# Altium PCB mkl.PcbDoc
Units mil, origin at the board's own origin, x right, y up, seen from the top; angles counter-clockwise.
Board outline 3515 x 1880 mil, 2 copper layers (Top Layer, Bottom Layer); 28 components, 69 nets, 203 pads, 0 vias.
Unrouted connection lines stored in the file: 7.
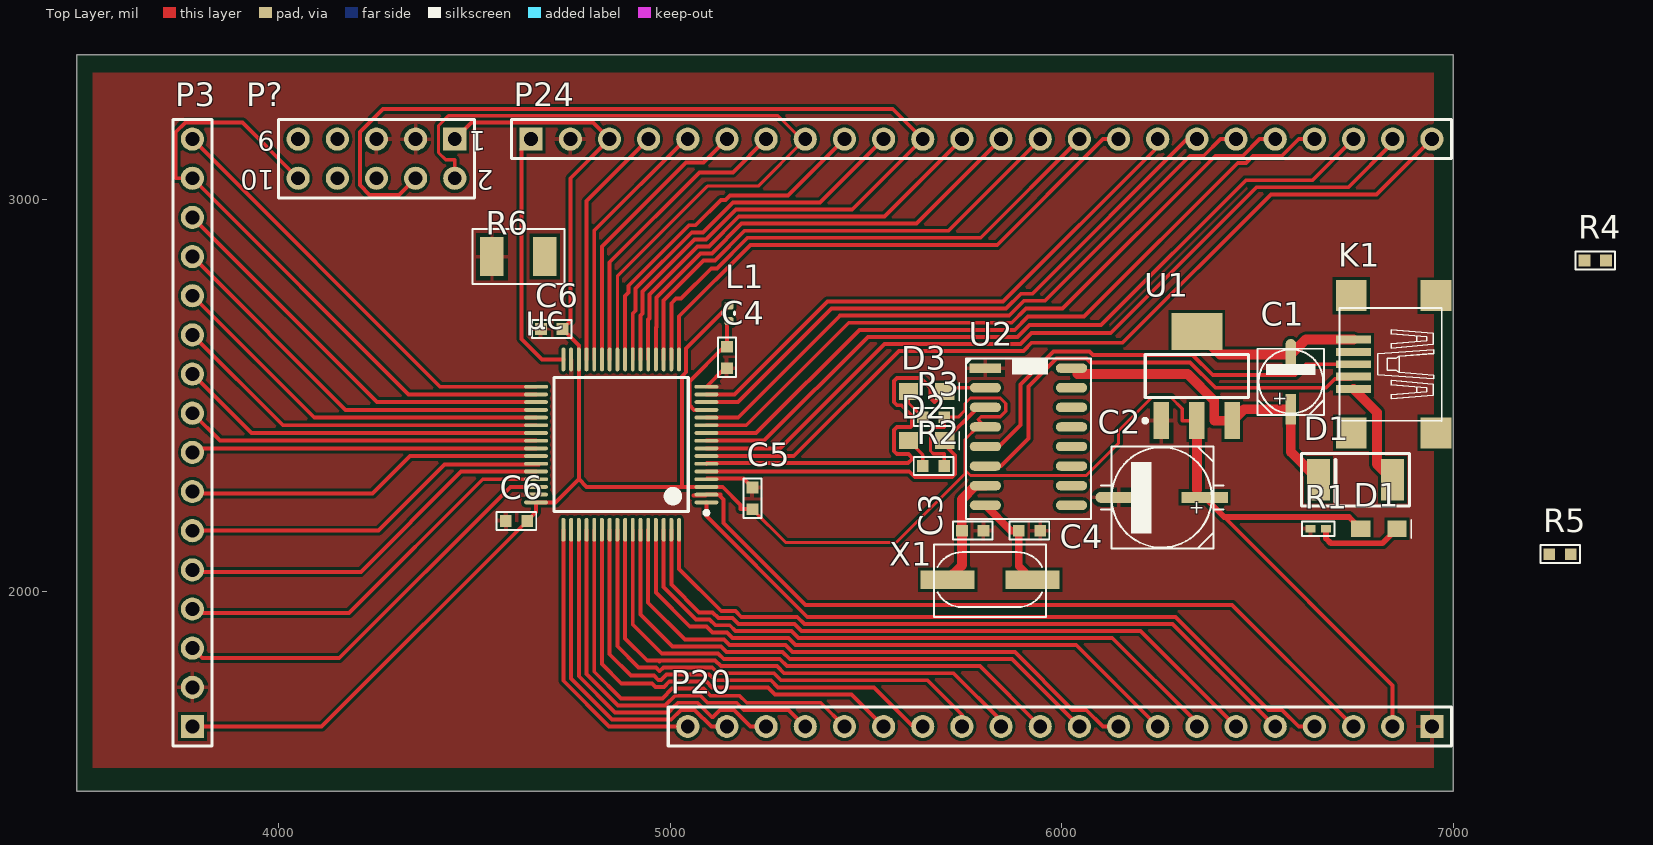
[diagram p0: Top Layer view]
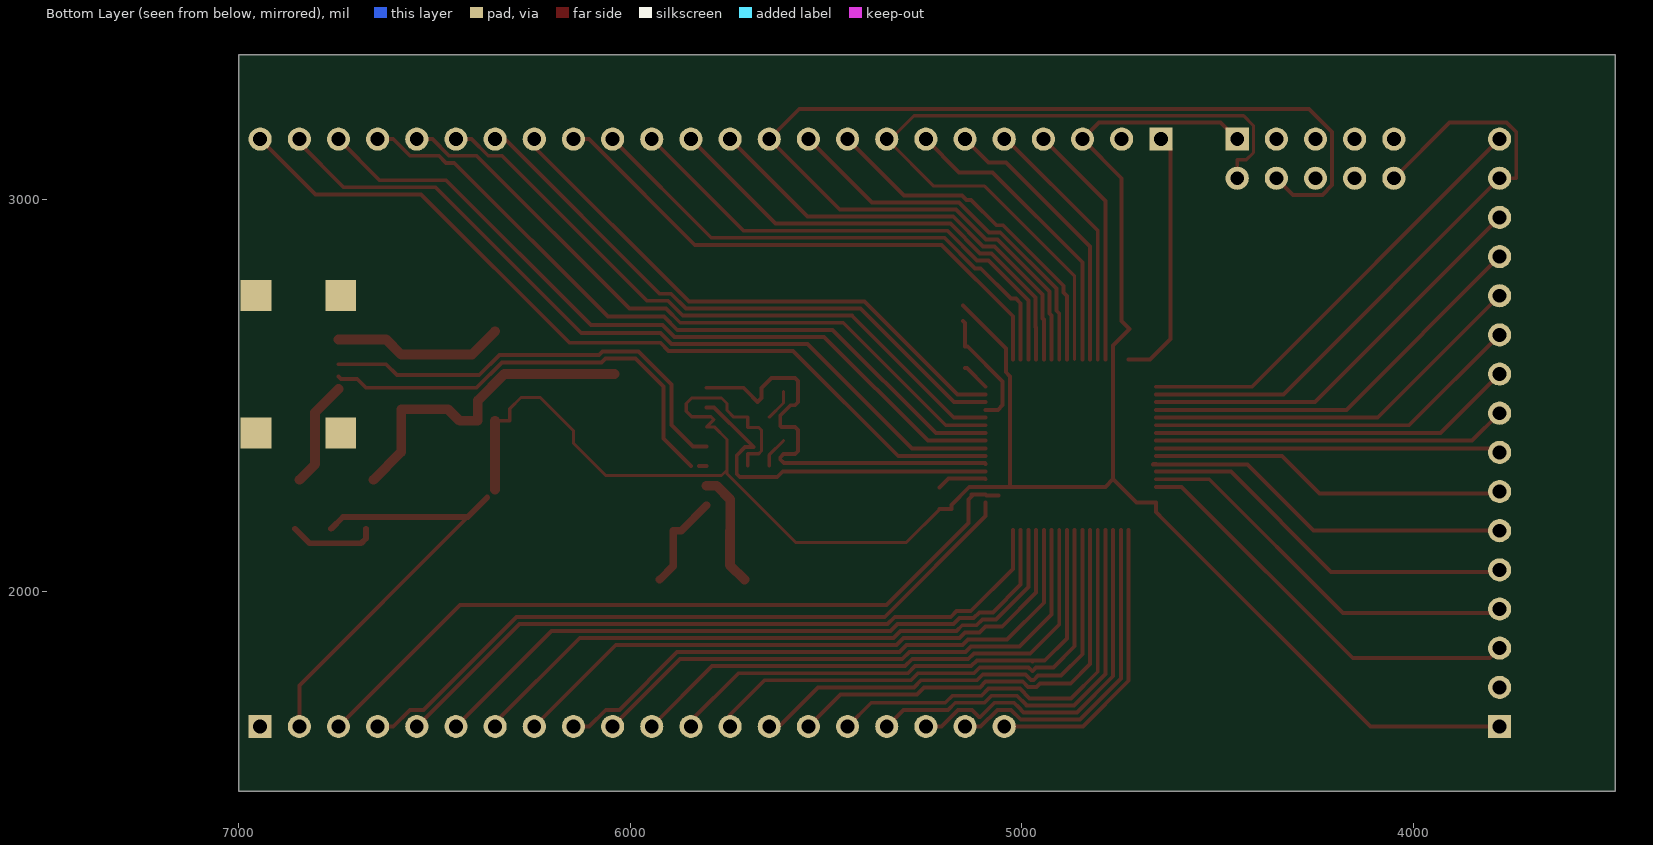
[diagram p1: Bottom Layer view, seen from below]

## Layer stack, top to bottom
Top Solder: solder mask 0.4, Solder Resist, Dk 3.5
Top Layer: signal copper 1.4
Dielectric 1: dielectric 12.6, FR-4, Dk 4.8
Bottom Layer: signal copper 1.4
Bottom Solder: solder mask 0.4, Solder Resist, Dk 3.5

## Board outline
3485,1490 7000,1490 7000,3370 3485,3370

## Design rules (kind name [scope] priority, off if disabled: settings)
Clearance Clearance_1 [All] p1: gap=8
PolygonConnect [All] p1: connectstyle=Relief reliefconductorwidth=10 reliefentries=4 polygonreliefangle="90 Angle" airgapwidth=10
RoutingVias [All] p1: holewidth=28 width=50 viastyle="Through Hole" minholewidth=28 minwidth=50 maxholewidth=28 maxwidth=50
SolderMaskExpansion [All] p1: expansion=4
Width [All] p1: maxlimit=30 minlimit=5 preferedwidth=8 minimp=50.000000 maximp=50.000000 favimp=50.000000
30 further rules are at their usual default settings.

## Components (designator, comment, footprint, x,y, rotation, side; value= is the part's Value field where it differs from the comment)
C1 "10uF-16V" PANACAP-b 6585,2535 r90 top
C2 "47uF-16V" PANACAP-D-GENERIC 6255,2240 r180 top
C3 "22pF" 0603C-GENERIC 5745,2155 r0 top
C4 "22pF" 0603C-GENERIC 5945,2155 r180 top
C4 "100nF" 0603C-GENERIC 5145,2570 r90 top
C5 "100nF" 0603C-GENERIC 5210,2265 r270 top
C6 "100nF" 0603C-GENERIC 4670,2670 r0 top
C6 "100nF" 0603C-GENERIC 4580,2180 r0 top
D1 "DIODE-GENERIC" DO-213AB(MELF) 6750,2285 r180 top
D1 "0805" 0805LED 6810,2160 r0 top
D2 "0805" 0805LED 5655,2385 r0 top
D3 "0805" 0805LED 5655,2510 r0 top
K1 "Connector_USB_THT_USB-B-MINI" USB-MINI-B 6745,2580 r180 top
L1 "xuH" L0402 5150,2710 r90 top
P3 "Header 16" HDR1X16 3780,1655 r90 top
P20 "Header 20" HDR1X20 6945,1655 r180 top
P24 "Header 24" HDR1X24 4645,3155 r0 top
P? "Header 5X2" HDR2X5 4450,3155 r180 top
R1 "150R" 0402R-GENERIC 6675,2160 r180 top
R2 "680K" 0603R-680K 5645,2320 r0 top
R3 "680K" 0603R-680K 5645,2445 r0 top
R4 "0R" 0603R-0R 7335,2845 r0 top
R5 "0R" 0603R-0R 7245,2095 r0 top
R6 "0R" 1210C-GENERIC 4545,2855 r0 top
U1 "LM1117MPX-3.3" MP04A_N 6345,2550 r90 top
U2 "Interface_SMD_CH340G" SO16 5805,2570 r0 top
X1 "12MHz" XTAL-HC49US-7MM 5925,2030 r180 top
µc "MKL16Z128VLH4" LQFP64_L 4875,2375 r180 top

## Footprints (in the part's own frame and the unit in brackets; to place one, negate y for a bottom-side part, rotate by r counter-clockwise, add the part's x,y. Pads: shape width x height; smd on the part's side, far side on the other; paste and mask are expansions set on the pad)
0402R-GENERIC [mil]
  rect 25x20 smd: 1(0,0) 2(40,0)
  silkscreen extent -21,-19 61,19, body extent -6,-10 46,10, height 14
0603C-GENERIC [mil] "CAPACITOR 0603"
  rect 30x30 smd: 1(0,0) 2(55,0)
  silkscreen extent -23,-23 78,23, body extent -4,-15 59,15, height 19
0603R-0R [mil] "RESISTOR 0603"
  rect 30x30 smd: 1(0,0) 2(55,0)
  silkscreen extent -23,-23 78,23, body extent -4,-15 59,15, height 20
0603R-680K [mil] "RESISTOR 0603"
  rect 30x30 smd: 1(0,0) 2(55,0)
  silkscreen extent -23,-23 78,23, body extent -4,-15 59,15, height 20
0805LED [mm]
  rect 1.25x1.1 smd: A(-1.175,0) K(1.175,0)
  silkscreen extent 2.1,-0.6 2.1,0.59
1210C-GENERIC [mil]
  rect 60x100 smd: 1(0,0) 2(135,0)
  silkscreen extent -50,-70 185,70, body extent -10,-50 145,50, height 46
DO-213AB(MELF) [mm]
  rect 1.5x2.7 smd: A(-2.4,0) K(2.4,0)
  silkscreen extent -3.5,-1.7 3.5,1.7
HDR1X16 [mm] "Connector; Header; 16 Position"
  rect 1.5x1.5 hole 0.9: 1(0,0)
  round 1.5 hole 0.9: 2(2.54,0) 3(5.08,0) 4(7.62,0) 5(10.16,0) 6(12.7,0) 7(15.24,0) 8(17.78,0) 9(20.32,0) 10(22.86,0) 11(25.4,0) 12(27.94,0) 13(30.48,0) 14(33.02,0) 15(35.56,0) 16(38.1,0)
  silkscreen extent -1.27,-1.27 39.37,1.27
HDR1X20 [mm] "Connector; Header; 20 Position"
  rect 1.5x1.5 hole 0.9: 1(0,0)
  round 1.5 hole 0.9: 2(2.54,0) 3(5.08,0) 4(7.62,0) 5(10.16,0) 6(12.7,0) 7(15.24,0) 8(17.78,0) 9(20.32,0) 10(22.86,0) 11(25.4,0) 12(27.94,0) 13(30.48,0) 14(33.02,0) 15(35.56,0) 16(38.1,0) 17(40.64,0) 18(43.18,0) 19(45.72,0) 20(48.26,0)
  silkscreen extent -1.27,-1.27 49.53,1.27
HDR1X24 [mm] "Connector; Header; 24 Position"
  rect 1.5x1.5 hole 0.9: 1(0,0)
  round 1.5 hole 0.9: 2(2.54,0) 3(5.08,0) 4(7.62,0) 5(10.16,0) 6(12.7,0) 7(15.24,0) 8(17.78,0) 9(20.32,0) 10(22.86,0) 11(25.4,0) 12(27.94,0) 13(30.48,0) 14(33.02,0) 15(35.56,0) 16(38.1,0) 17(40.64,0) 18(43.18,0) 19(45.72,0) 20(48.26,0) 21(50.8,0) 22(53.34,0) 23(55.88,0) 24(58.42,0)
  silkscreen extent -1.27,-1.27 59.69,1.27
HDR2X5 [mm] "Connector; Header; 5x2 Position"
  rect 1.5x1.5 hole 0.9: 1(0,0)
  round 1.5 hole 0.9: 2(0,2.54) 3(2.54,0) 4(2.54,2.54) 5(5.08,0) 6(5.08,2.54) 7(7.62,0) 8(7.62,2.54) 9(10.16,0) 10(10.16,2.54)
  silkscreen extent -1.27,-1.27 11.43,3.81
L0402 [mm] "L0402"
  rrect50% 0.5x0.6 smd: 1(-0.5,0) 2(0.5,0)
  silkscreen extent -0.08,-0.38 0.08,0.38, body extent -0.48,-0.23 0.52,0.27, height 0.35
LQFP64_L [mm] "Thin QFP, 64-Leads, Body 10x10mm, Pitch 0.5mm, IPC High Density"
  oval 1.55x0.25 smd: 1(-5.525,3.75) 2(-5.525,3.25) 3(-5.525,2.75) 4(-5.525,2.25) 5(-5.525,1.75) 6(-5.525,1.25) 7(-5.525,0.75) 8(-5.525,0.25) 9(-5.525,-0.25) 10(-5.525,-0.75) 11(-5.525,-1.25) 12(-5.525,-1.75) 13(-5.525,-2.25) 14(-5.525,-2.75) 15(-5.525,-3.25) 16(-5.525,-3.75) 33(5.525,-3.75) 34(5.525,-3.25) 35(5.525,-2.75) 36(5.525,-2.25) 37(5.525,-1.75) 38(5.525,-1.25) 39(5.525,-0.75) 40(5.525,-0.25) 41(5.525,0.25) 42(5.525,0.75) 43(5.525,1.25) 44(5.525,1.75) 45(5.525,2.25) 46(5.525,2.75) 47(5.525,3.25) 48(5.525,3.75)
  oval 0.25x1.55 smd: 17(-3.75,-5.525) 18(-3.25,-5.525) 19(-2.75,-5.525) 20(-2.25,-5.525) 21(-1.75,-5.525) 22(-1.25,-5.525) 23(-0.75,-5.525) 24(-0.25,-5.525) 25(0.25,-5.525) 26(0.75,-5.525) 27(1.25,-5.525) 28(1.75,-5.525) 29(2.25,-5.525) 30(2.75,-5.525) 31(3.25,-5.525) 32(3.75,-5.525) 49(3.75,5.525) 50(3.25,5.525) 51(2.75,5.525) 52(2.25,5.525) 53(1.75,5.525) 54(1.25,5.525) 55(0.75,5.525) 56(0.25,5.525) 57(-0.25,5.525) 58(-0.75,5.525) 59(-1.25,5.525) 60(-1.75,5.525) 61(-2.25,5.525) 62(-2.75,5.525) 63(-3.25,5.525) 64(-3.75,5.525)
  silkscreen extent -5.65,-4.35 4.35,4.55, body extent -5,-5 5,5, height 1.6
MP04A_N [mm]
  rect 2.4x1 smd: 1(-2.9,2.3) 2(-2.9,0) 3(-2.9,-2.3)
  rect 2.4x3.3 smd: 4(2.9,0)
  silkscreen extent -3.02,-3.35 1.4,3.47, body extent -1.85,-3.35 1.85,3.35, height 1.8
PANACAP-b [mm]
  rect 2x0.7 smd: +(-1.778,0)
  oval 2x0.7 smd: -(1.778,0)
  silkscreen extent -2.15,-2.15 2.15,2.15, body extent -2.3,-2.15 2.3,2.15, height 5.4
PANACAP-D-GENERIC [mm]
  rect 3x0.7 smd: +(-2.794,0)
  oval 3x0.7 smd: -(2.794,0)
  silkscreen extent -4,-3.3 3.93,3.3, body extent -3.5,-3.3 3.5,3.3, height 5.4
SO16 [mil]
  rect 80x24 smd: 1(0,0)
  oval 80x24 smd: 2(0,-50) 3(0,-100) 4(0,-150) 5(0,-200) 6(0,-250) 7(0,-300) 8(0,-350) 9(220,-350) 10(220,-300) 11(220,-250) 12(220,-200) 13(220,-150) 14(220,-100) 15(220,-50) 16(220,0)
  silkscreen extent -50,-385 270,25, body extent -20,-385 240,25, height 61
USB-MINI-B [mm]
  rect 2.3x0.5 smd: 1(0,1.6) 2(0,0.8) 3(0,0) 4(0,-0.8) 5(0,-1.6)
  rect 2x2 all layers, no hole: M1(-5.35,4.45) M2(0.15,4.45) M3(-5.35,-4.45) M4(0.15,-4.45)
  silkscreen extent -5.72,-3.65 0.91,3.7, body extent -5.73,-3.93 0.96,3.77, height 4.21
XTAL-HC49US-7MM [mm]
  rect 3.5x1.2 smd: 1(0,0) 2(5.499,0)
  silkscreen extent -0.89,-2.29 6.38,2.41, body extent -1.61,-2.27 7.07,2.41, height 3.05

## Part data
C1: library part Passives_Capacitors_Elco_SMD_PANACAP-10UF-16V-FK, "GENERIC CAPACITOR POLARISED"
C2: library part Passives_Capacitors_Elco_SMD_PANACAP-47UF-16V-FK, "GENERIC CAPACITOR POLARISED"
C3 C4: library part Passives_Capacitors_0603_22PF-50V-C0G-PAN, "CAPACITOR 0603 CERAMIC"
C4 C5 C6 C6: library part Passives_Capacitors_0603_100NF-25V-X7R-TDK, "CAPACITOR 0603 CERAMIC"
D1: "GENERIC DIODE"
D1 D2 D3: library part LED_SMD_0805
K1: "MINI USB B DEVICE CONNECTOR"
L1: library part Passives_Inductors_0402_TBD
P3: "Header, 16-Pin"
P20: "Header, 20-Pin"
P24: "Header, 24-Pin"
P?: "Header, 5-Pin, Dual row"
R1: library part Passives_Resistors_0402_100R, "RESISTOR 0402 GENERIC"
R2 R3: library part Passives_Resistors_0603_680K, "GENERIC RESISTOR 0603"
R4 R5: library part Passives_Resistors_0603_0R, "GENERIC JUMPER 0603"
R6: library part Passives_Capacitors_1210_1210C-TBD, "CAPACITOR 1210 CERAMIC VALUE TO BE DETERMINED"
U1: "800mA Low-Dropout Linear Regulator, 4-pin SOT-223"
X1: library part 12MC-HC49US-7MM, "12MHz CRYSTAL HC49US SHORT BODY"

## Nets (pads, with @x,y where several pads share a name; then routed paths per layer and width w, separated by ;. In a path a pad name is that pad's centre, name@x,y a point inside that pad or via, vN(x,y) a via of type N, cw(c..) or ccw(c..) an arc to the next point about the centre after c; other vN are vias at no path point)
NetC1_-: C1.- K1.5 U1.4 | length 440.2
  Top Layer w25: U1.4 6404.17,2605 C1.- 6622.99,2642.99 K1.5
NetC3_1: C3.1 U2.7 X1.2 | length 295
  Top Layer w25: X1.2 5745,2066.5 C3.1 5744.5,2155.5 5744.5,2234.5 5780,2270 U2.7
NetC4_2: C4.2@5890,2155 U2.8 X1.1 | length 251.4
  Top Layer w20: U2.8 5870,2155 5890,2155 5890,2065 X1.1
NetD1_A: D1.A@6844.49,2285 K1.1 | length 273.2
  Top Layer w25: K1.1 6805,2457.01 6805,2324.49 D1.A@6844.49,2285
NetD1_K: D1.K@6856.26,2160 R1.1 | length 226.7
  Top Layer w15: R1.1 6675,2135 6687.15,2122.85 6819.11,2122.85 D1.K@6856.26,2160
NetD2_A: D2.A R2.1 | length 80
  Top Layer w8: D2.A 5645,2348.74 R2.1
NetD3_A: D3.A R3.1 | length 80
  Top Layer w8: D3.A 5608.74,2481.26 R3.1
NetK1_2: K1.2 U2.6 | length 1154.9
  Top Layer w10: U2.6 U2.6@5825,2320 ; 5845,2320 5915,2390 5915,2523.36 5986.64,2595 6063.36,2595 6073.36,2585 6327.81,2585 6392.81,2520 6674.49,2520 6697,2542.51 6739,2542.51 K1.2
NetK1_3: K1.3 U2.5 | length 1137.8
  Top Layer w10: U2.5 5840,2370 5895,2425 5895,2528.81 5979.19,2613 6070.81,2613 6079.88,2603.93 6334.34,2603.93 6385.64,2552.63 6596.09,2552.63 6623.46,2580 K1.3
NetP3_3: P3.3 µc.46 | length 1068.7
  Top Layer w10: P3.3 3805,1830 4155,1830 4591.73,2266.73 µc.46
NetP3_4: P3.4 µc.45 | length 1023
  Top Layer w10: P3.4 3790,1945 4180,1945 4521.42,2286.42 µc.45
NetP3_5: P3.5 µc.44 | length 985.6
  Top Layer w10: P3.5 3785,2050 4210,2050 4466.1,2306.1 µc.44
NetP3_6: P3.6 µc.43 | length 963.1
  Top Layer w10: P3.6 4255,2155 4424.1,2324.1 4664.94,2324.1 4663.25,2325.79 µc.43
NetP3_7: P3.7 µc.42 | length 919.1
  Top Layer w10: P3.7 3785,2250 4240,2250 4335.47,2345.47 µc.42
NetP3_8: P3.8 µc.41 | length 881.7
  Top Layer w10: P3.8 3790.16,2365.16 µc.41
NetP3_9: P3.9 µc.40 | length 906.5
  Top Layer w10: P3.9 3850.16,2384.84 µc.40
NetP3_10: P3.10 µc.39 | length 939.8
  Top Layer w10: P3.10 3930.47,2404.53 µc.39
NetP3_11: P3.11 µc.38 | length 973.1
  Top Layer w10: P3.11 4010.79,2424.21 µc.38
NetP3_12: P3.12 µc.37 | length 1006.3
  Top Layer w10: P3.12 4091.1,2443.9 µc.37
NetP3_13: P3.13 µc.36 | length 1039.6
  Top Layer w10: P3.13 4171.42,2463.58 µc.36
NetP3_14: P3.14 µc.35 | length 1072.9
  Top Layer w10: P3.14 4251.73,2483.27 µc.35
NetP3_16: P3.16 µc.33 | length 1139.4
  Top Layer w10: P3.16 4412.36,2522.64 µc.33
NetP20_3: P20.3 µc.2 | length 1968.6
  Top Layer w10: 5059.58,2245.36 5090.83,2245.36 µc.2 5128.03,2247.05 ; 5125.45,2245.36 5136.03,2234.79 5136.03,2174.42 5345.46,1965 6435,1965 P20.3
NetP20_4: P20.4 µc.1 | length 1810
  Top Layer w10: µc.1 5092.52,2192.48 5350,1935 6290.46,1935 6527.93,1697.53 6562.62,1697.53 6605.14,1655 P20.4
NetP20_5: P20.5 µc.64 | length 1789.1
  Top Layer w10: µc.64 5022.64,2057.36 5130.47,1949.53 5167,1949.53 5181.52,1935 5324.54,1935 5342.54,1917 6283,1917 P20.5
NetP20_6: P20.6 µc.63 | length 1732.2
  Top Layer w10: µc.63 5002.95,2017.5 5073.93,1946.53 5108.02,1946.53 5123.02,1931.53 5159.54,1931.53 5174.07,1917 5317.09,1917 5335.09,1899 6201,1899 P20.6
NetP20_7: P20.7 µc.62 | length 1661.1
  Top Layer w10: µc.62 4983.27,2011.73 5066.47,1928.53 5100.56,1928.53 5115.56,1913.53 5152.09,1913.53 5166.61,1899 5309.63,1899 5327.63,1881 6129,1881 6345,1665 P20.7
NetP20_8: P20.8 µc.61 | length 1583.6
  Top Layer w10: µc.61 4963.58,1996.94 5050,1910.53 5093.1,1910.53 5108.1,1895.53 5144.63,1895.53 5159.16,1881 5302.18,1881 5320.18,1863 6037,1863 P20.8
NetP20_9: P20.9 µc.60 | length 1518.4
  Top Layer w10: µc.60 4943.9,1971.1 5037.47,1877.53 5137.17,1877.53 5151.7,1863 5294.72,1863 5312.72,1845 5880.46,1845 6027.93,1697.53 6062.62,1697.53 6105.14,1655 P20.9
NetP20_10: P20.10 µc.59 | length 1455.9
  Top Layer w10: µc.59 4924.21,1940.79 5005.47,1859.53 5129.72,1859.53 5144.25,1845 5287.27,1845 5305.27,1827 5873,1827 P20.10
NetP20_11: P20.11 µc.58 | length 1390.4
  Top Layer w10: µc.58 4904.53,1915.47 4978.47,1841.53 5122.26,1841.53 5136.79,1827 5279.81,1827 5297.81,1809 5791,1809 P20.11
NetP20_12: P20.12 µc.57 | length 1341.3
  Top Layer w10: µc.57 4884.84,1880.16 4941.47,1823.53 4971.02,1823.53 4973.11,1821.44 4975.19,1823.53 5114.81,1823.53 5129.33,1809 5272.35,1809 5290.35,1791 5724,1791 5845,1670 P20.12
NetP20_13: P20.13 µc.56 | length 1287.8
  Top Layer w10: µc.56 4865.16,1859.84 4919.47,1805.53 4963.56,1805.53 4973.11,1795.98 4982.65,1805.53 5107.35,1805.53 5121.88,1791 5264.9,1791 5282.9,1773 5657,1773 5745,1685 P20.13
NetP20_14: P20.14 µc.55 | length 1205.1
  Top Layer w10: µc.55 4845.47,1839.53 4900,1785 4958.63,1785 4969.63,1774 4976.58,1774 4990.11,1787.53 5099.89,1787.53 5114.42,1773 5257.44,1773 5275.44,1755 5520,1755 5620,1655 P20.14
NetP20_15: P20.15 µc.54 | length 1139.6
  Top Layer w10: µc.54 4825.79,1814.21 4875,1765 4953.18,1765 4962.18,1756 4984.03,1756 4997.56,1769.53 5092.44,1769.53 5106.97,1755 5249.99,1755 5267.99,1737 5463,1737 P20.15
NetP20_16: P20.16 µc.53 | length 1079.8
  Top Layer w10: µc.53 4806.1,1794.81 4873.91,1727 4980.49,1727 5005.02,1751.53 5084.98,1751.53 5102.98,1733.53 5177.53,1733.53 5195.53,1715.53 5384.47,1715.53 P20.16
NetP20_17: P20.17 µc.52 | length 1002.9
  Top Layer w10: µc.52 4786.42,1789.04 4866.46,1709 4987.95,1709 4989.83,1710.89 5012.47,1733.53 5077.53,1733.53 5095.53,1715.53 5170.07,1715.53 5188.07,1697.53 5302.47,1697.53 P20.17
NetP20_18: P20.18 µc.51 | length 940.8
  Top Layer w10: µc.51 4766.73,1783.27 4859,1691 4995.4,1691 5008.74,1704.34 5019.93,1715.53 5070.07,1715.53 5106.07,1679.53 5109.38,1679.53 5127.38,1697.53 5162.62,1697.53 5205.14,1655 P20.18
NetP20_19: P20.19 µc.50 | length 849
  Top Layer w10: µc.50 4747.05,1777.5 4851.54,1673 5002.86,1673 5027.38,1697.53 5062.62,1697.53 5105.14,1655 P20.19
NetP20_20: P20.20 µc.49 | length 751.7
  Top Layer w10: µc.49 4727.36,1771.73 4844.09,1655 P20.20
NetP24_1: P24.1 µc.32 | length 649.5
  Top Layer w10: P24.1 4620,3130 4620,2645 4672.48,2592.52 µc.32
NetP24_4: P24.4 µc.29 | length 628.2
  Top Layer w10: µc.29 4786.42,2996.42 P24.4
NetP24_5: P24.5 µc.28 | length 664.4
  Top Layer w10: µc.28 4806.1,2921.1 5040,3155 P24.5
NetP24_6: P24.6 µc.27 | length 721.1
  Top Layer w10: µc.27 4825.79,2880.79 5040,3095 5085,3095 P24.6
NetP24_7: P24.7 µc.26 | length 777.8
  Top Layer w10: µc.26 4845.47,2840.47 5075,3070 5160,3070 P24.7
NetP24_9: P24.9 µc.24 | length 898.4
  Top Layer w10: µc.24 4884.84,2754.84 4893.27,2763.27 4893.27,2780.55 5047.72,2935 5065,2935 5130,3000 5141.81,3000 5152.81,3011 5301,3011 P24.9
NetP24_10: P24.10 µc.23 | length 975.3
  Top Layer w10: µc.23 4904.53,2709.98 4911.27,2716.72 4911.27,2773.09 5055.18,2917 5084.27,2917 5160.27,2993 5383,2993 P24.10
NetP24_12: P24.12 µc.21 | length 1129.2
  Top Layer w10: µc.21 4943.9,2693.9 4947.27,2697.27 4947.27,2758.18 5070.09,2881 5099.18,2881 5175.18,2957 5547,2957 P24.12
NetP24_13: P24.13 µc.20 | length 1206.1
  Top Layer w10: µc.20 4963.58,2673.58 4965.27,2675.27 4965.27,2750.72 5077.54,2863 5106.63,2863 5182.63,2939 5629,2939 P24.13
NetP24_14: P24.14 µc.19 | length 1283
  Top Layer w10: µc.19 4983.27,2743.27 5085,2845 5114.09,2845 5190.09,2921 5711,2921 P24.14
NetP24_15: P24.15 µc.18 | length 1358.9
  Top Layer w10: µc.18 5002.95,2735.77 5015.18,2748 5028,2748 5105,2825 5119.54,2825 5197.54,2903 5793,2903 P24.15
NetP24_16: P24.16 µc.17 | length 1419.9
  Top Layer w10: µc.17 5022.64,2702.64 5205,2885 5835.14,2885 6087.53,3137.38 6087.53,3137.53 6105,3155 P24.16
NetP24_17: P24.17 µc.15 | length 1434.3
  Top Layer w10: µc.15 5164.79,2502.95 5401.84,2740 5850,2740 6245,3135 P24.17
NetP24_18: P24.18 µc.14 | length 1530.7
  Top Layer w10: µc.14 5173.27,2483.27 5412,2722 5857.46,2722 5895.62,2760.16 5925.16,2760.16 6320,3155 P24.18
NetP24_19: P24.19 µc.12 | length 1647
  Top Layer w10: µc.12 5173.9,2443.9 5434,2704 5864.91,2704 5903.07,2742.16 5957.07,2742.16 6327.38,3112.47 6362.62,3112.47 6405.14,3155 P24.19
NetP24_20: P24.20 µc.11 | length 1755.2
  Top Layer w10: µc.11 5194.21,2424.21 5456,2686 5872.37,2686 5908.37,2722 6002,2722 6392.47,3112.47 6462.62,3112.47 6505.14,3155 P24.20
NetP24_21: P24.21 µc.10 | length 1863.3
  Top Layer w10: µc.10 5219.53,2404.53 5483,2668 5879.82,2668 5913.82,2702 6057,2702 6449.47,3094.47 6470.07,3094.47 6488.07,3112.47 6562.62,3112.47 6605.14,3155 P24.21
NetP24_22: P24.22 µc.9 | length 1971.5
  Top Layer w10: µc.9 5239.84,2384.84 5505,2650 5887.28,2650 5917.28,2680 6100,2680 6470,3050 6640,3050 P24.22
NetP24_23: P24.23 µc.8 | length 2085.5
  Top Layer w10: µc.8 5280.16,2365.16 5547,2632 5894.73,2632 5922.73,2660 6125,2660 6497,3032 6732,3032 6845,3145 P24.23
NetP24_24: P24.24 µc.7 | length 2187.8
  Top Layer w10: µc.7 5315.47,2345.47 5584,2614 5902.19,2614 5923.19,2635 6155,2635 6534,3014 6804,3014 P24.24
RESET: P3.15 P?.10 µc.34 | length 1648.2
  Top Layer w10: P?.10 3907.47,3197.53 3762.38,3197.53 3737.47,3172.62 3737.47,3055 P3.15 4332.05,2502.95 µc.34
RXD: D2.K U2.3 µc.5 | length 906.8
  Top Layer w10: µc.5 5610.51,2306.1 5624.62,2292 5720.38,2292 5728,2299.62 5728,2347.39 5707.04,2368.35 5684.61,2368.35 D2.K 5786.26,2470 U2.3
SWD_CLK: P24.11 P?.4 µc.22 | length 2851.5
  Top Layer w10: P?.4 4307.47,3012.47 4232.38,3012.47 4207.47,3037.38 4207.47,3172.62 4266.38,3231.53 5568.47,3231.53 P24.11 5465,2975 5167.72,2975 5091.72,2899 5062.63,2899 4929.27,2765.64 4929.27,2709.27 4924.21,2704.21 µc.22
SWD_IO: P24.8 P?.2 µc.25 | length 1971.4
  Top Layer w8: P?.2 4450,3102.41 4426.56,3102.41 4408.47,3120.5 4408.47,3189.5 4433.5,3214.53 5275.47,3214.53 P24.8@5340,3150 ; µc.25 4865.16,2805.16 5095,3035 5225,3035 P24.8@5340,3150 ; P24.8 P24.8@5340,3150
TXD: D3.K U2.2 µc.6 | length 1124
  Top Layer w10: µc.6 5094.2,2327.47 5607.46,2327.47 5617,2337.02 5617,2342.38 5609.04,2350.35 5578.75,2350.35 5571.13,2357.96 5571.13,2412.04 5578.75,2419.65 5614.04,2419.65 5617,2422.62 5617,2448.96 5590.61,2475.35 5578.75,2475.35 5571.13,2482.96 5571.13,2537.04 5578.75,2544.65 5638.73,2544.65 5664.26,2519.12 5664.26,2493.67 5674.58,2483.35 D3.K 5711.26,2520 U2.2
VCC: C1.+ D1.K@6655.51,2285 U1.3 U2.16 | length 846
  Top Layer w25: 6040,2555 6321.75,2555 6389.17,2487.57 6389.17,2435.83 U1.3 6464.72,2465 C1.+ 6585,2355.51 D1.K@6655.51,2285
VDD1: C2.+ C5.2 C6.2 D1.A@6763.74,2160 L1.2 P3.1 P20.2 P24.3 P?.1 R2.2 R3.2 U1.2 U2.4 µc.3 µc.30 µc.48 | length 6995.5
  Top Layer w8: C5.2 5295,2125 5577.43,2125 5753,2300.57 5753,2310.06 ; R2.2 5700,2351.35 5671.68,2351.35 5664.65,2358.38 5664.65,2411.62 5671.68,2418.65 5700,2418.65 R3.2 5735.66,2445 5753,2462.34 5753,2479.94 5767.06,2494 5842.94,2494 5857,2479.94 5857,2460.06 5842.94,2446 5793.6,2446 5786.3,2438.7 U2.4 5785,2420 5753,2388 5753,2310.06 ; U1.2 6307.74,2435.83 6307.74,2466.43 6279.1,2495.07 6229.79,2495.07 6145,2410.28 6145,2378.06 6062.94,2296 5767.06,2296 5753,2310.06
  Top Layer w10: P3.1 4110,1655 4635,2180 4657.48,2202.48 µc.48 4707.36,2227.36 4766.73,2286.73 ; P?.1 4492.53,3197.53 4802.47,3197.53 P24.3 4745,3055 4745,2690 4725,2670 4766.73,2628.27 µc.30 4766.73,2286.73 ; 5030,2266.73 5030,2548.95 5040.64,2559.58 5040.64,2620.32 L1.2 ; C5.2 5180,2210 5180,2220.53 5134.3,2266.23 5123.77,2266.23 5123.77,2266.73 µc.3 4786.73,2266.73 4766.73,2286.73 ; 6415,2190 6845,1760 P20.2
  Top Layer w15: C2.+ 6415,2190 6733.74,2190 D1.A@6763.74,2160
  Top Layer w25: 6345,2260 U1.2
VDDA: C4.2@5145,2625 L1.1 µc.13 | length 309
  Top Layer w10: µc.13 5061.27,2463.58 5049.01,2475.84 5049.01,2536.01 5138,2625 5145,2625 5145,2685.32 L1.1
VSS1: C2.- C3.2 C4.1 C5.1 C6.1 P3.2 P20.1 P24.2 P?.3 P?.5 R1.2 R4.1 R4.2 R5.1 R5.2 R6.1 U1.1 U2.1 µc.4 µc.16 µc.31 µc.47 | length 199.8
  Top Layer w10: µc.4 5094.2,2288.1 5186.9,2288.1 C5.1 ; µc.16 5139.88,2570 C4.1@5145,2570
pads on no net: K1.4 K1.M1 K1.M2 K1.M3 K1.M4 P?.6 P?.7 P?.8 P?.9 R6.2 U2.9 U2.10 U2.11 U2.12 U2.13 U2.14 U2.15

## Polygon pours and split planes (outlines as drawn)
VSS1 on Top Layer "Top Layer-No Net" (solid, pour order 6): 3525,3325 6950,3325 6950,1550 3525,1550

## Text inside footprints (layer, text, board x,y; h text height)
C1: Top Overlay "+" at 6572.2,2472.01 h35 r90
C2: Top Overlay "+" at 6365.24,2227.2 h35 r180
P?: Top Overlay "10" at 3990,3075 h50 r180; Top Overlay "9" at 3990,3175 h50 r180; Top Overlay "1" at 4530,3175 h50 r180; Top Overlay "2" at 4550,3075 h50 r180